# Altium PCB Chocolate_Vending_Machine_V3.0.PcbDoc
Units mm, origin at the board's own origin, x right, y up, seen from the top; angles counter-clockwise.
Board outline 87.2 x 78.2 mm, 2 copper layers (Top Layer, Bottom Layer); 16 components, 21 nets, 125 pads, 17 vias.
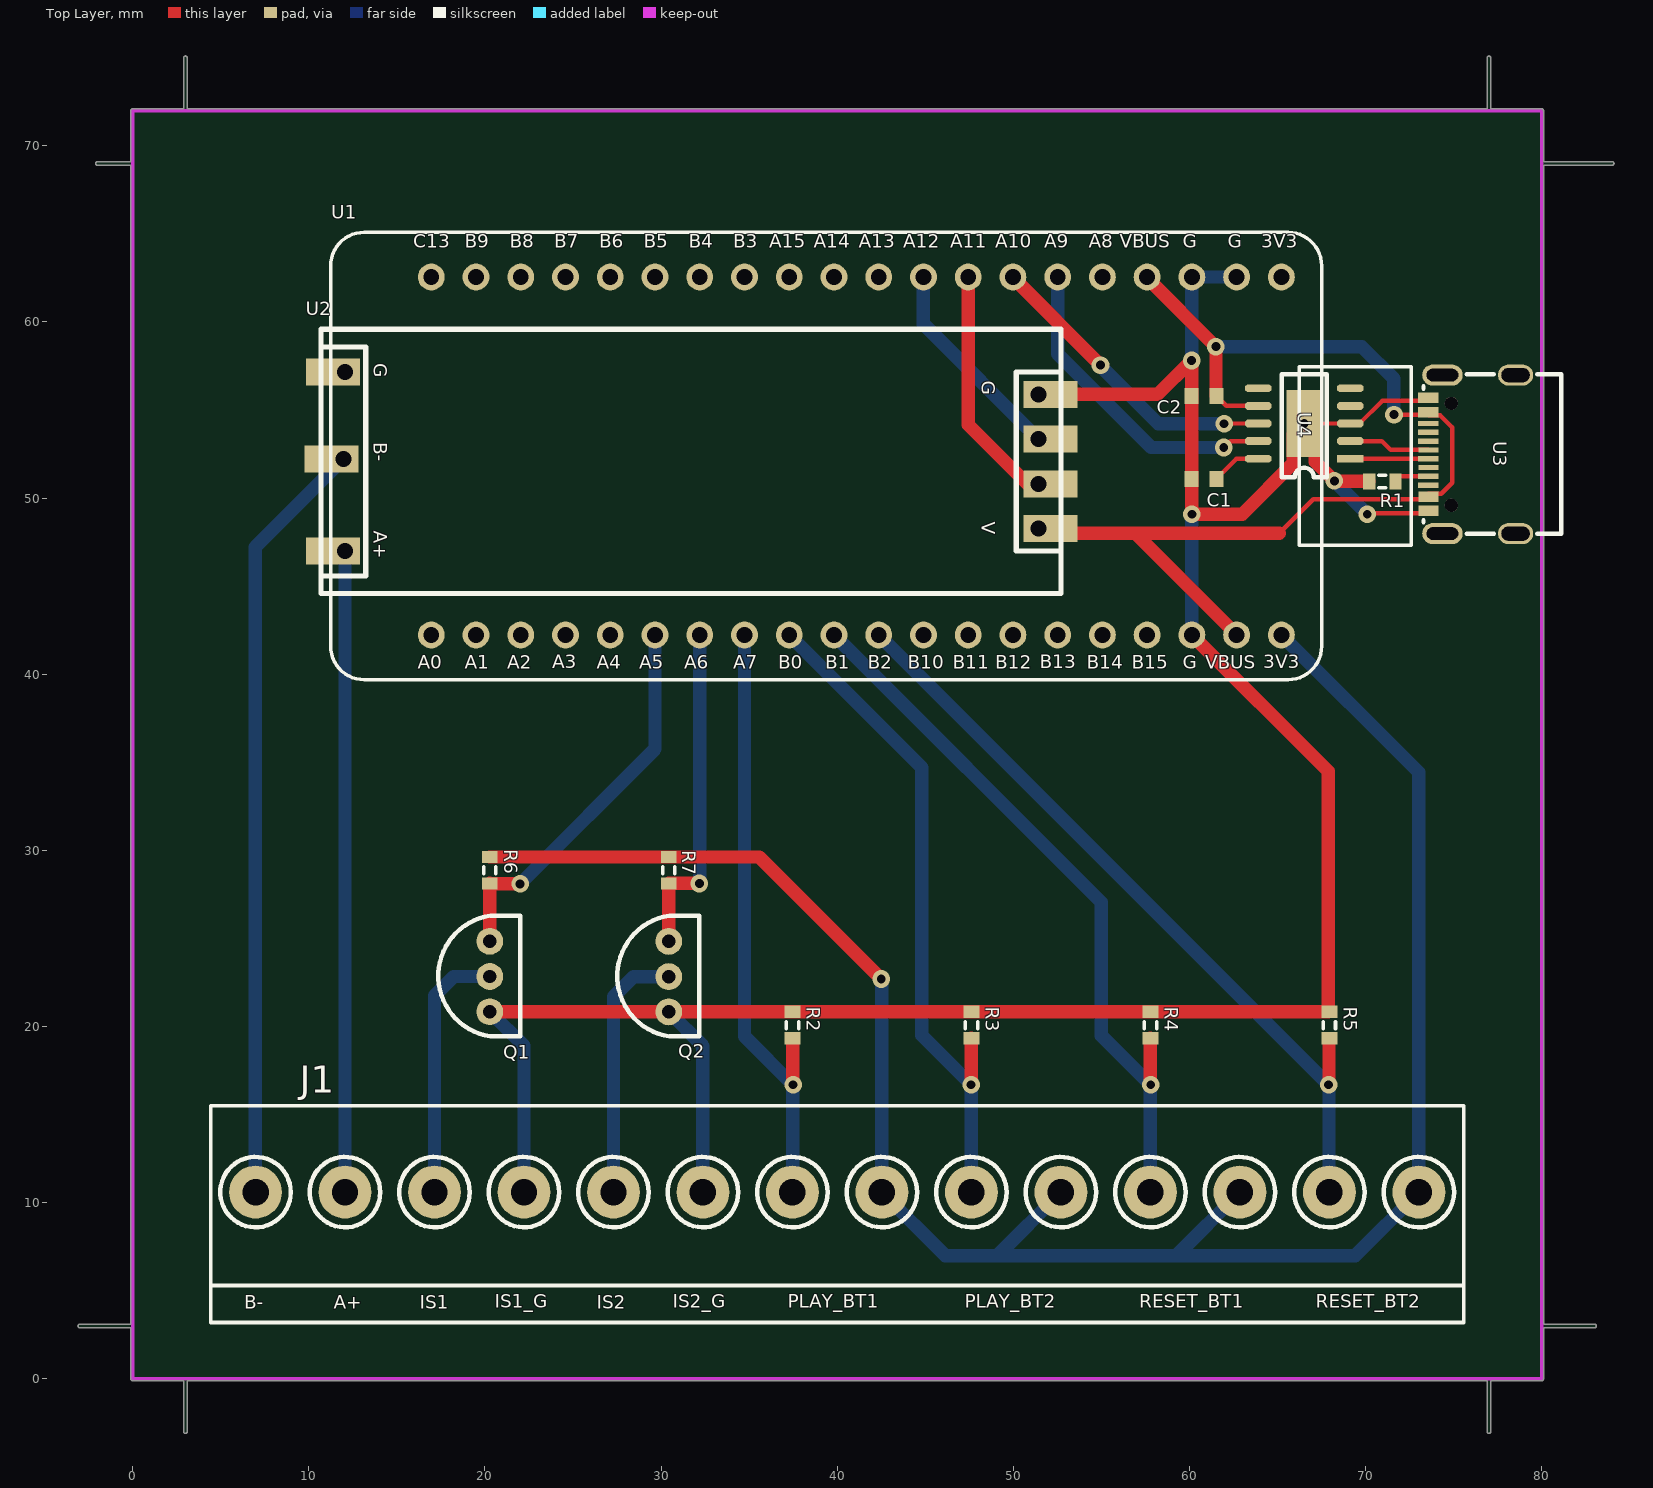
[diagram p0: Top Layer view]
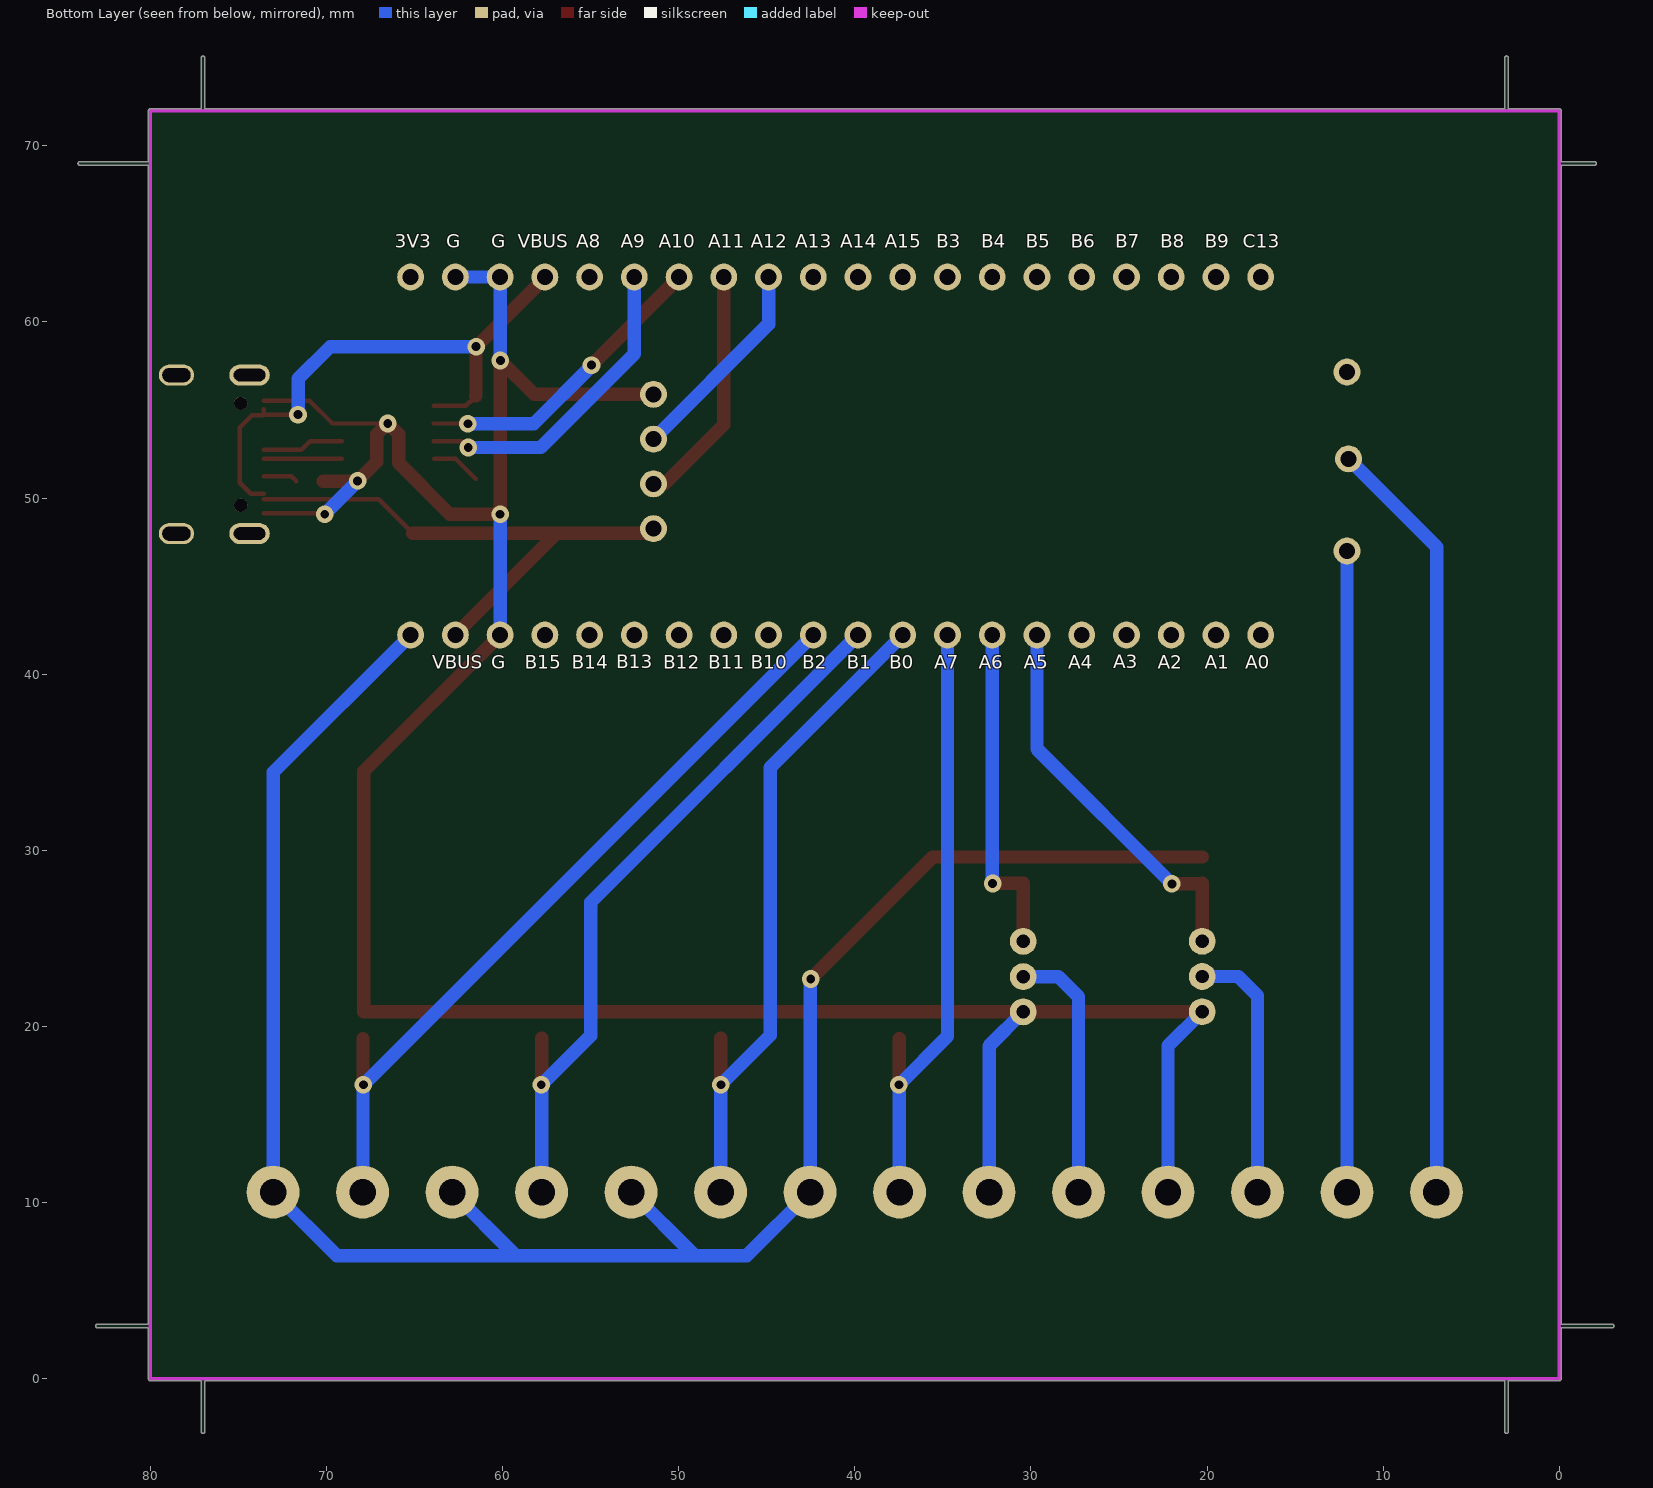
[diagram p1: Bottom Layer view, seen from below]

## Layer stack, top to bottom
Top Solder: solder mask 0.0102, Solder Resist, Dk 3.5
Top Layer: signal copper 0.0356
Dielectric 1: dielectric 0.32, FR-4, Dk 4.8
Bottom Layer: signal copper 0.0356
Bottom Solder: solder mask 0.0102, Solder Resist, Dk 3.5

## Board outline
-0.1,0 -0.1,2.9 -3,2.9 cw(c-3,3) -3,3.1 -0.1,3.1 -0.1,68.9 -2,68.9 cw(c-2,69) -2,69.1 -0.1,69.1 -0.1,72 cw(c0,72) 0,72.1 2.9,72.1 2.9,75 cw(c3,75) 3.1,75 3.1,72.1 76.9,72.1 76.9,75 cw(c77,75) 77.1,75 77.1,72.1 80,72.1 cw(c80,72) 80.1,72 80.1,69.1 84,69.1 cw(c84,69) 84.1,69 cw(c84,69) 84,68.9 80.1,68.9 80.1,3.1 83,3.1 cw(c83,3) 83.1,3 cw(c83,3) 83,2.9 80.1,2.9 80.1,0 cw(c80,0) 80,-0.1 77.1,-0.1 77.1,-3 cw(c77,-3) 76.9,-3 76.9,-0.1 3.1,-0.1 3.1,-3 cw(c3,-3) 2.9,-3 2.9,-0.1 0,-0.1 cw(c0,0)

## Design rules (kind name [scope] priority, off if disabled: settings)
Clearance [All] p1: gap=0.102 ignorepadtopadclearanceinfootprint=FALSE except(0: Arc-Hole Track-Hole SMDPad-Hole THPad-Hole Via-Hole Fill-Hole Poly-Hole Region-Hole Text-Hole)
ComponentClearance [All] p1 off: gap=0.254 collisioncheckmode=3 verticalgap=0.254 showdistances=FALSE
PolygonConnect [All] p1: connectstyle=Relief reliefconductorwidth=0.254 reliefentries=4 polygonreliefangle="90 Angle" airgapwidth=0.254
RoutingVias [All] p1: holewidth=0.5 width=1 viastyle="Through Hole" minholewidth=0.5 minwidth=1 maxholewidth=0.5 maxwidth=1
SolderMaskExpansion [All] p1: expansion=0.102 istentingtop=FALSE
Width [All] p1: maxlimit=0.762 minlimit=0.178 preferedwidth=0.254 minimp=50.000000 maximp=50.000000 favimp=50.000000
29 further rules are at their usual default settings.

## Components (designator, comment, footprint, x,y, rotation, side; value= is the part's Value field where it differs from the comment)
C1 "Cap Semi" 1608[0603] 60.825,51.089 r180 top value=0.1uF
C2 "Cap Semi" 1608[0603] 60.825,55.788 r0 top value=0.1uF
J1 "Terminal_Block_14P" terminal_block_14P 6.98,10.6 r0 top
Q1 "S9013" S9013 20.281,22.845 r0 top
Q2 "S9013" S9013 30.441,22.838 r0 top
R1 "Res3" J1-0603 70.95,50.95 r0 top value=5.1K
R2 "Res3" J1-0603 37.46,20.085 r90 top value=1K
R3 "Res3" J1-0603 47.62,20.085 r90 top value=1K
R4 "Res3" J1-0603 57.78,20.085 r90 top value=1K
R5 "Res3" J1-0603 67.94,20.085 r90 top value=1K
R6 "Res3" J1-0603 20.279,28.875 r270 top value=1K
R7 "Res3" J1-0603 30.439,28.875 r270 top value=1K
U1 "STM32F411_TYPEC" STM32F411_TypeC 13.147,39.691 r0 top
U2 "UART_TO_485" UART_TO_RS485 10.863,59.591 r270 top
U3 "Type_C" Type_C_V2 77.004,52.664 r90 top
U4 "CH340K" CH340K_V1 66.514,54.236 r180 top

## Footprints (in the part's own frame and the unit in brackets; to place one, negate y for a bottom-side part, rotate by r counter-clockwise, add the part's x,y. Pads: shape width x height; smd on the part's side, far side on the other; paste and mask are expansions set on the pad)
1608[0603] [mm] "Chip Capacitor, Body 1.6x0.8mm, IPC High Density"
  rect 0.8x0.9 smd: 1(-0.7,0) 2(0.7,0)
  body extent -0.87,-0.48 0.87,0.48, height 1.3
CH340K_V1 [mm] "自己畫的"
  rect 2x3.8 smd: 0(0,0)
  rect 1.5x0.45 smd: 1(-2.616,2)
  oct 1.5x0.45 smd: 2(-2.616,1) 3(-2.616,0) 4(-2.616,-1) 5(-2.616,-2) 6(2.616,-2) 7(2.616,-1) 8(2.616,0) 9(2.616,1) 10(2.616,2)
  silkscreen extent -1.27,-2.79 1.27,3.05
J1-0603 [mm] "Chip Resistor, Body 1.6x0.8mm, IPC High Density"
  rect 0.7x0.9 smd: 1(-0.75,0) 2(0.75,0)
  silkscreen extent -0.2,-0.35 0.2,0.35, body extent -0.85,-0.48 0.85,0.48, height 0.9
S9013 [mil] "S9013_TO-92"
  round 60 hole 30: 0(-0.08,-78.87) 1(-0.08,-0.13) 2(-0.08,78.61)
  silkscreen extent -115,-134 68,136
STM32F411_TypeC [mil]
  round 60 hole 35.43: 1(2050,100) 2(1950,100) 3(1850,100) 4(1750,100) 5(1650,100) 6(1550,100) 7(1450,100) 8(1350,100) 9(1250,100) 10(1150,100) 11(1050,100) 12(950,100) 13(850,100) 14(750,100) 15(650,100) 16(550,100) 17(450,100) 18(350,100) 19(250,100) 20(150,100) 21(2050,900) 22(1950,900) 23(1850,900) 24(1750,900) 25(1650,900) 26(1550,900) 27(1450,900) 28(1350,900) 29(1250,900) 30(1150,900) 31(1050,900) 32(950,900) 33(850,900) 34(750,900) 35(650,900) 36(550,900) 37(450,900) 38(350,900) 39(250,900) 40(150,900)
  silkscreen extent -75,0 2340,1000, body extent -79,-4 2344,1004, height 50
terminal_block_14P [mm] "端子台14P,可放字"
  round 3 hole 1.5 paste+0 mask+0.051: 1(0,0) 2(5.08,0) 3(10.16,0) 4(15.24,0) 5(20.32,0) 6(25.4,0) 7(30.48,0) 8(35.56,0) 9(40.64,0) 10(45.72,0) 11(50.8,0) 12(55.88,0) 13(60.96,0) 14(66.04,0)
  silkscreen extent -2.54,-7.4 68.58,4.9
Type_C_V2 [mm] "孟昌學長的"
  oval 1.2x2 hole 0.8 slot 1.6 at 90 deg: 0(-4.678,-1.506) 0(4.322,-1.506)
  oval 1.2x2.3 hole 0.7 slot 1.8 at 90 deg: 0(-4.678,2.644) 0(4.322,2.644)
  rect 0.3x1.15 smd: A1(-3.528,3.442) A4(-2.728,3.44) A5(-1.428,3.444) A6(-0.428,3.444) A7(0.072,3.442) A9(2.372,3.444) A12(3.172,3.444) B1(2.872,3.444) B4(2.072,3.444) B5(1.572,3.444) B6(0.572,3.444) B7(-0.928,3.442) B9(-2.428,3.44) B12(-3.228,3.442)
  rect 0.3x1.148 smd: A8(-1.928,3.444) B8(1.072,3.444)
  round 0.75 hole 0.75 unplated: ""(-3.068,2.144) ""(2.712,2.144)
  silkscreen extent -4.68,-4.11 4.38,3.72, body extent -4.67,-4.06 4.27,3.84, height 3.25
UART_TO_RS485 [mil]
  round 60 hole 35.43: 1(445.71,1597.13) 2(345.71,1597.13) 3(245.71,1597.13) 4(145.71,1597.13) 5(495.71,47.13) 6(289.8,43.58) 7(95.71,47.13)
  rect 60x120 smd: 1(445.71,1623.9) 2(345.71,1623.9) 3(245.71,1623.9) 4(145.71,1623.9) 5(495.71,20.35) 6(289.8,16.81) 7(95.71,20.35)
  silkscreen extent 0,-6 591,1647

## Part data
C1 C2: "Capacitor (Semiconductor SIM Model)", LatestRevisionDate=29-May-2009, LatestRevisionNote="IPC-7351 Footprint Added.", PackageDescription="Chip Capacitor", PackageReference=C1206, Published=8-Jun-2000, Publisher="Altium Limited"
R1 R2 R3 R4 R5 R6 R7: "Resistor", LatestRevisionDate=29-May-2009, LatestRevisionNote="IPC-7351 Footprint Added.", PackageDescription="Chip Resistor", PackageReference=J1-0603, Published=8-Jun-2000, Publisher="Altium Limited"

## Via types
v1: diameter 1, hole 0.5, Top Layer to Bottom Layer, tented both sides, 9 vias
v2: diameter 1, hole 0.5, Top Layer to Bottom Layer, 8 vias

## Nets (pads, with @x,y where several pads share a name; then routed paths per layer and width w, separated by ;. In a path a pad name is that pad's centre, name@x,y a point inside that pad or via, vN(x,y) a via of type N, cw(c..) or ccw(c..) an arc to the next point about the centre after c; other vN are vias at no path point)
5V: C2.2 U1.2 U1.24 U2.1 U3.A4 U3.A9 U3.B4 U3.B9 U4.7 | length 63.7
  Top Layer w0.254: C2.2@61.529,55.788 61.529,55.734 61.798,55.465 61.852,55.465 62.08,55.237 U4.7@63.897,55.237 ; 65.093,47.998 67.032,49.937 U3.A4 ; v1@71.613,54.737 U3.B4@73.56,54.737 ; U3.B4 73.586,54.713 74.224,54.713 74.923,54.014 74.923,50.878 74.301,50.256 73.585,50.256 U3.B9@73.566,50.237 ; U3.B4@73.564,54.739 U3.A9@73.564,55.033
  Top Layer w0.762: U2.1@51.43,48.27 51.702,47.998 56.914,47.998 ; U1.24@57.573,62.527 v1(61.5,58.6) ; v1@61.503,58.597 61.503,56.125 61.506,56.123 61.506,55.807 C2.2@61.509,55.804 ; U1.2@62.677,42.235 56.914,47.998 ; 65.093,47.998 56.914,47.998
  Bottom Layer w0.762: v1(61.5,58.6) 69.781,58.601 71.607,56.775 v1@71.607,54.747
  other v1: 71.607,54.743
CH340K_Rx: U1.26 U4.9 | length 18.1
  Top Layer w0.254: v1(61.95,52.875) 62.311,53.236 U4.9
  Bottom Layer w0.762: U1.26 52.517,58.183 57.825,52.875 v1(61.95,52.875)
CH340K_Tx: U1.27 U4.8 | length 17.4
  Top Layer w0.254: v1@61.982,54.236 U4.8
  Top Layer w0.762: U1.27@49.977,62.523 v1(54.95,57.55)
  Bottom Layer w0.762: U1.27@49.977,62.525 U1.27 ; v1(54.95,57.55) 54.95,57.5 58.23,54.22 v1(61.966,54.22)
GND: C1.2 C2.1 J1.4 J1.6 Q1.0 Q2.0 R1.1 R2.2 R3.2 R4.2 R5.2 U1.3 U1.22 U1.23 U2.4 U3.A1 U3.A12 U3.B1 U3.B12 U4.0 U4.3 | length 155.7
  Top Layer w0.254: v2(66.514,54.236) U4.3 69.655,54.236 70.955,55.536 U3.B1 ; v1(70.094,49.089) 70.141,49.136 U3.A1
  Top Layer w0.762: Q1.0@20.283,20.839 30.436,20.839 Q2.0 R2.2@37.391,20.835 ; R2.2 R3.2 R4.2 67.871,20.835 67.871,34.498 U1.3 ; U2.4@51.43,55.89 52.11,55.89 58.201,55.89 v1(60.122,57.81) 60.125,57.808 C2.1 C1.2 v1@60.125,49.102 ; v1(60.137,49.089) 62.989,49.089 65.895,51.995 65.895,53.617 v2(66.514,54.236) 67.133,53.617 67.133,52.069 v1(68.224,50.978) 68.238,50.964 R1.1@70.186,50.964
  Bottom Layer w0.762: Q1.0 22.22,18.901 J1.4 ; Q2.0 32.38,18.895 J1.6 ; v1(60.122,57.81) 60.129,57.818 60.129,62.544 U1.23 U1.22 ; U1.3@60.131,42.238 v1@60.131,49.083 ; v1(68.224,50.978) 68.224,50.968 70.094,49.099 v1(70.094,49.089)
Infrared_1_Input: Q1.2 R6.2 U1.15 | length 22.3
  Top Layer w0.762: Q1.2 R6.2 20.292,28.112 21.987,28.112 v2(22,28.1)
  Bottom Layer w0.762: v2(22,28.1) 29.657,35.757 U1.15
Infrared_2_Input: Q2.2 R7.2 U1.14 | length 19.1
  Top Layer w0.762: Q2.2 R7.2 v2(32.175,28.125)
  Bottom Layer w0.762: v2(32.175,28.125) 32.186,28.136 32.186,42.22 U1.14
Infrared_Sensor1: J1.3 Q1.1 | length 14.7
  Bottom Layer w0.762: J1.3 17.14,21.74 18.242,22.842 Q1.1
Infrared_Sensor2: J1.5 Q2.1 | length 14.7
  Bottom Layer w0.762: J1.5 27.3,21.7 28.435,22.835 Q2.1
NetC1_1: C1.1 U4.10 | length 2.8
  Top Layer w0.254: C1.1 62.661,52.226 U4.10@63.889,52.226
NetR1_2: R1.2 U3.A5 | length 2
  Top Layer w0.254: R1.2 71.986,51.236 U3.A5
PlayBt_1_Input: J1.7 R2.1 U1.13 | length 35.4
  Top Layer w0.762: v2@37.48,16.7 R2.1@37.48,19.315
  Bottom Layer w0.762: U1.13 34.737,19.443 37.48,16.7 37.48,10.62 J1.7
  other v2: 37.5,16.7
PlayBt_2_Input: J1.9 R3.1 U1.12 | length 38.5
  Top Layer w0.762: v2@47.62,16.72 R3.1
  Bottom Layer w0.762: U1.12 44.8,34.708 44.8,19.51 v2@47.61,16.7 ; J1.9@47.6,10.62 v2(47.6,16.7)
ResetBt_1_Input: J1.11 R4.1 U1.11 | length 41.7
  Top Layer w0.762: v2@57.78,16.7 R4.1
  Bottom Layer w0.762: U1.11 55,27.048 55,19.49 57.79,16.7 57.78,16.69 J1.11
  other v2: 57.8,16.7
ResetBt_2_Input: J1.13 R5.1 U1.10 | length 44.9
  Top Layer w0.762: v2(67.9,16.7) 67.92,16.72 R5.1@67.92,19.315
  Bottom Layer w0.762: U1.10 67.888,16.7 v2(67.9,16.7) 67.92,16.68 67.92,10.62 J1.13
RS485_A+: J1.2 U2.5 | length 36.4
  Bottom Layer w0.762: J1.2 U2.5@12.06,47
RS485_B-: J1.1 U2.6 | length 43.7
  Bottom Layer w0.762: J1.1@6.962,10.618 6.962,47.222 U2.6@11.962,52.222
RS485_Rx: U1.29 U2.3 | length 11.9
  Bottom Layer w0.762: U1.29 44.897,59.883 U2.3@51.43,53.35
RS485_Tx: U1.28 U2.2 | length 13.8
  Top Layer w0.762: U1.28 47.437,54.163 50.79,50.81 U2.2@51.43,50.81
  Bottom Layer w0.762: U1.28@47.419,62.533 U1.28 U1.28@47.444,62.545
Terminal_Block_8: J1.8 J1.10 J1.12 J1.14 R6.1 R7.1 U1.1 | length 115.7
  Top Layer w0.762: R6.1 R7.1 35.575,29.625 v2(42.5,22.7)
  Bottom Layer w0.762: v2(42.5,22.7) 42.52,22.68 42.52,10.62 J1.8 46.14,7 49.1,7 ; J1.10 49.1,7 ; J1.12 59.26,7 ; U1.1 73.02,34.429 J1.14 69.42,7 59.26,7 ; 49.1,7 59.26,7
UD+: U3.A6 U4.1 | length 4.4
  Top Layer w0.254: U4.1 U3.A6
UD-: U3.A7 U4.2 | length 4.6
  Top Layer w0.254: U4.2 70.926,53.236 71.426,52.736 U3.A7
pads on no net: U1.4 U1.5 U1.6 U1.7 U1.8 U1.9 U1.16 U1.17 U1.18 U1.19 U1.20 U1.21 U1.25 U1.30 U1.31 U1.32 U1.33 U1.34 U1.35 U1.36 U1.37 U1.38 U1.39 U1.40 U2.7 U3. U3.0 U3.A8 U3.B5 U3.B6 U3.B7 U3.B8 U4.4 U4.5 U4.6

## Keep-outs
Keep-Out Layer:
  lines w0.2: 0,0 0,72 80,72 80,0 0,0

## Silkscreen, mask and mechanical layers (free items; w line width, h text height)
Top Overlay:
  text "IS1_G" at 20.569,4.033 h0.76
  text "IS2_G" at 30.666,4.033 h0.76
  text "PLAY_BT1" at 37.207,4.033 h0.76
  text "PLAY_BT2" at 47.24,4.033 h0.76
  text "RESET_BT1" at 57.146,4.033 h0.76
  text "RESET_BT2" at 67.169,4.033 h0.76
  text "B-" at 6.345,3.969 h0.76
  text "A+" at 11.425,3.969 h0.76
  text "IS1" at 16.315,3.969 h0.76
  text "IS2" at 26.348,3.969 h0.76
Mechanical 1:
  lines w0.2: -3,3 83,3 ; -2,69 84,69 ; 3,-3 3,75 ; 77,-3 77,75
  lines w0.254: -2.508,1.524 -2,0 ; -2.508,70.476 -2,72 ; -2.254,0 -1.746,0 ; -2.254,72 -1.746,72 ; -2,30.896 -2,0 ; -2,41.104 -2,72 ; -1.492,1.524 -2,0 ; -1.492,70.476 -2,72 ; 0,-2.508 0,-2 ; 1.524,-2.762 0,-2.254 ; 1.524,-1.746 0,-2.254 ; 34.896,-2.254 0,-2.254 ; 45.104,-2.254 80,-2.254 ; 78.476,-2.762 80,-2.254 ; 78.476,-1.746 80,-2.254 ; 80,-2.508 80,-2
  text "72 (mm)" at -1.086,31.15 h1.52 r90
  text "80 (mm)" at 35.15,-3.168 h1.52

## Text inside footprints (layer, text, board x,y; h text height)
U1: Top Overlay "B9" at 18.862,63.96 h1.3; Top Overlay "C13" at 15.941,63.948 h1.3; Top Overlay "B8" at 21.402,63.96 h1.3; Top Overlay "B7" at 23.942,63.963 h1.3; Top Overlay "B3" at 34.102,63.96 h1.3; Top Overlay "B4" at 31.562,63.963 h1.3; Top Overlay "B5" at 29.022,63.963 h1.3; Top Overlay "B6" at 26.482,63.96 h1.3; Top Overlay "A12" at 43.754,63.96 h1.3; Top Overlay "A13" at 41.214,63.96 h1.3; Top Overlay "A14" at 38.674,63.96 h1.3; Top Overlay "A15" at 36.134,63.96 h1.3; Top Overlay "A8" at 54.295,63.96 h1.3; Top Overlay "A9" at 51.755,63.96 h1.3; Top Overlay "A10" at 48.961,63.96 h1.3; Top Overlay "A11" at 46.421,63.96 h1.3; Top Overlay "3V3" at 64.074,63.96 h1.3; Top Overlay "G" at 62.169,63.948 h1.3; Top Overlay "G" at 59.629,63.948 h1.3; Top Overlay "VBUS" at 56.032,63.963 h1.3; Top Overlay "B15" at 56.708,40.071 h1.3; Top Overlay "G" at 59.629,40.071 h1.3; Top Overlay "VBUS" at 60.899,40.057 h1.3; Top Overlay "3V3" at 64.201,40.072 h1.3; Top Overlay "B11" at 46.548,40.057 h1.3; Top Overlay "B12" at 48.961,40.057 h1.3; Top Overlay "B13" at 51.501,40.072 h1.3; Top Overlay "B14" at 54.168,40.057 h1.3; Top Overlay "B0" at 36.642,40.071 h1.3; Top Overlay "B1" at 39.309,40.057 h1.3; Top Overlay "B2" at 41.722,40.057 h1.3; Top Overlay "B10" at 44.008,40.071 h1.3; Top Overlay "A4" at 26.355,40.057 h1.3; Top Overlay "A5" at 28.768,40.071 h1.3; Top Overlay "A6" at 31.308,40.071 h1.3; Top Overlay "A7" at 34.102,40.057 h1.3; Top Overlay "A3" at 23.815,40.072 h1.3; Top Overlay "A2" at 21.275,40.057 h1.3; Top Overlay "A1" at 18.862,40.057 h1.3; Top Overlay "A0" at 16.195,40.071 h1.3; Bottom Overlay "B14" at 56.073,40.057 h1.3; Bottom Overlay "B10" at 45.913,40.071 h1.3; Bottom Overlay "B13" at 53.533,40.072 h1.3; Bottom Overlay "A2" at 22.799,40.057 h1.3; Bottom Overlay "A5" at 30.419,40.071 h1.3; Bottom Overlay "VBUS" at 63.988,40.057 h1.3; Bottom Overlay "G" at 60.645,40.071 h1.3; Bottom Overlay "B15" at 58.74,40.071 h1.3; Bottom Overlay "B12" at 50.866,40.057 h1.3; Bottom Overlay "B11" at 48.326,40.057 h1.3; Bottom Overlay "B2" at 42.992,40.057 h1.3; Bottom Overlay "B1" at 40.452,40.057 h1.3; Bottom Overlay "A7" at 35.499,40.057 h1.3; Bottom Overlay "A6" at 32.959,40.071 h1.3; Bottom Overlay "A3" at 25.339,40.072 h1.3; Bottom Overlay "A1" at 20.132,40.057 h1.3; Bottom Overlay "B0" at 38.039,40.071 h1.3; Bottom Overlay "A4" at 27.879,40.057 h1.3; Bottom Overlay "A0" at 17.846,40.071 h1.3; Bottom Overlay "B9" at 20.132,63.96 h1.3; Bottom Overlay "B5" at 30.292,63.963 h1.3; Bottom Overlay "A14" at 40.833,63.96 h1.3; Bottom Overlay "C13" at 17.973,63.948 h1.3; Bottom Overlay "B8" at 22.672,63.96 h1.3; Bottom Overlay "B7" at 25.212,63.963 h1.3; Bottom Overlay "B3" at 35.372,63.96 h1.3; Bottom Overlay "B4" at 32.832,63.963 h1.3; Bottom Overlay "A13" at 43.373,63.96 h1.3; Bottom Overlay "A15" at 38.293,63.96 h1.3; Bottom Overlay "A12" at 45.913,63.96 h1.3; Bottom Overlay "A10" at 51.12,63.96 h1.3; Bottom Overlay "A11" at 48.326,63.96 h1.3; Bottom Overlay "A8" at 55.819,63.96 h1.3; Bottom Overlay "VBUS" at 59.121,63.963 h1.3; Bottom Overlay "3V3" at 66.106,63.96 h1.3; Bottom Overlay "G" at 63.185,63.948 h1.3; Bottom Overlay "B6" at 27.752,63.96 h1.3; Bottom Overlay "A9" at 53.279,63.96 h1.3; Bottom Overlay "G" at 60.645,63.948 h1.3
U2: Top Overlay "G" at 48.2,56.66 h0.76 r270; Top Overlay "V" at 48.2,48.66 h0.76 r270; Top Overlay "G" at 13.7,57.66 h0.76 r270; Top Overlay "B-" at 13.7,53.16 h0.76 r270; Top Overlay "A+" at 13.7,48.16 h0.76 r270